# Altium PCB RC_LPF_PI.PcbDoc
Units mm, origin at the board's own origin, x right, y up, seen from the top; angles counter-clockwise.
Board outline 180 x 65 mm, 2 copper layers (Top Layer, Bottom Layer); 100 components, 41 nets, 200 pads, 61 vias.
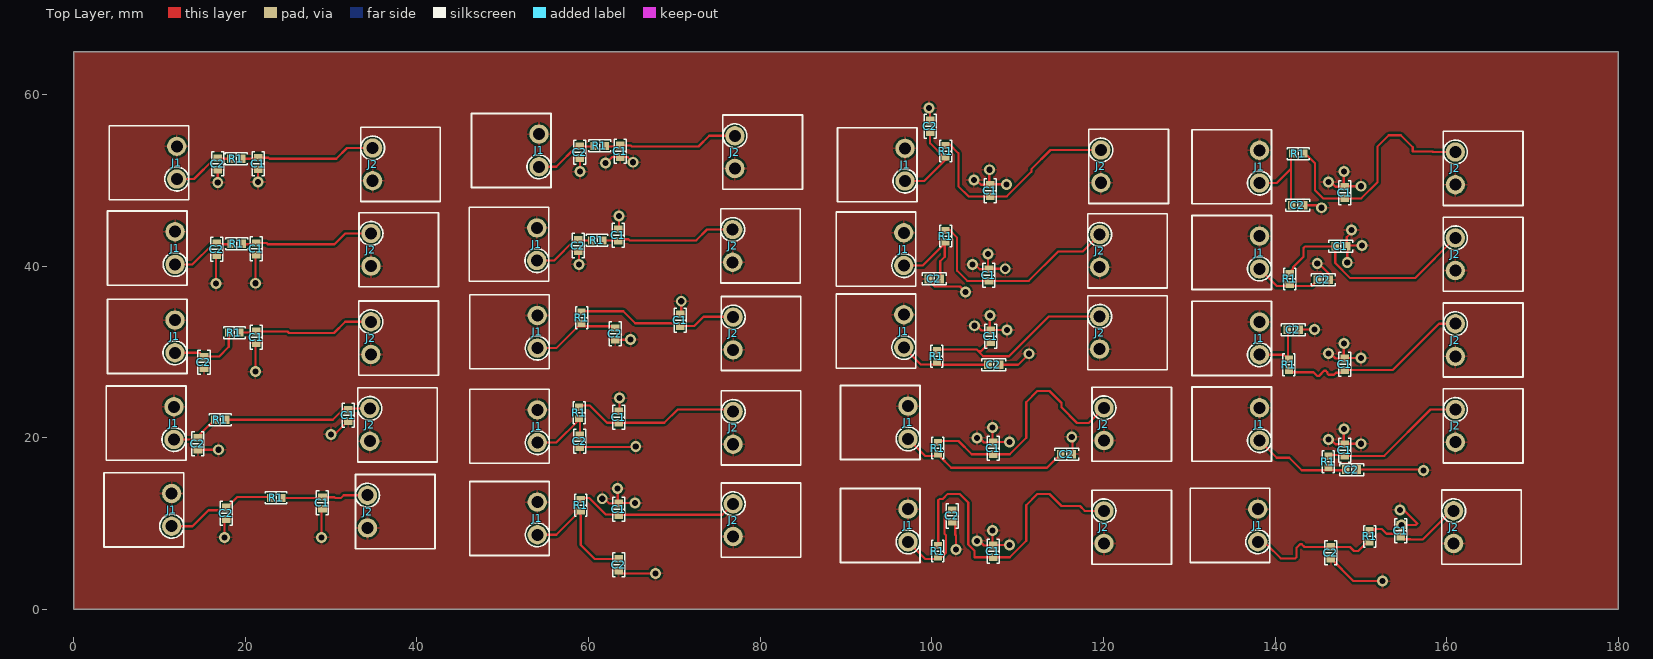
[diagram p0: Top Layer view]
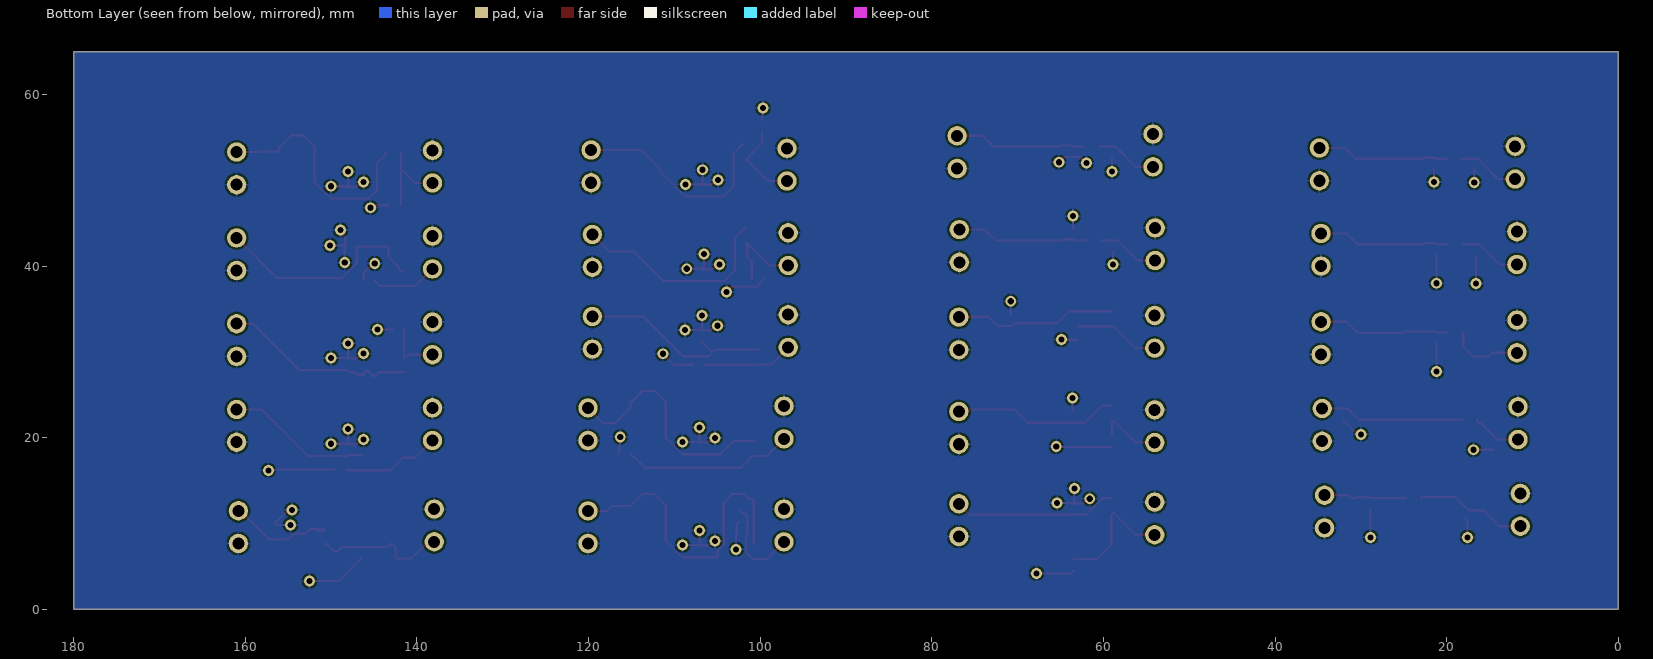
[diagram p1: Bottom Layer view, seen from below]
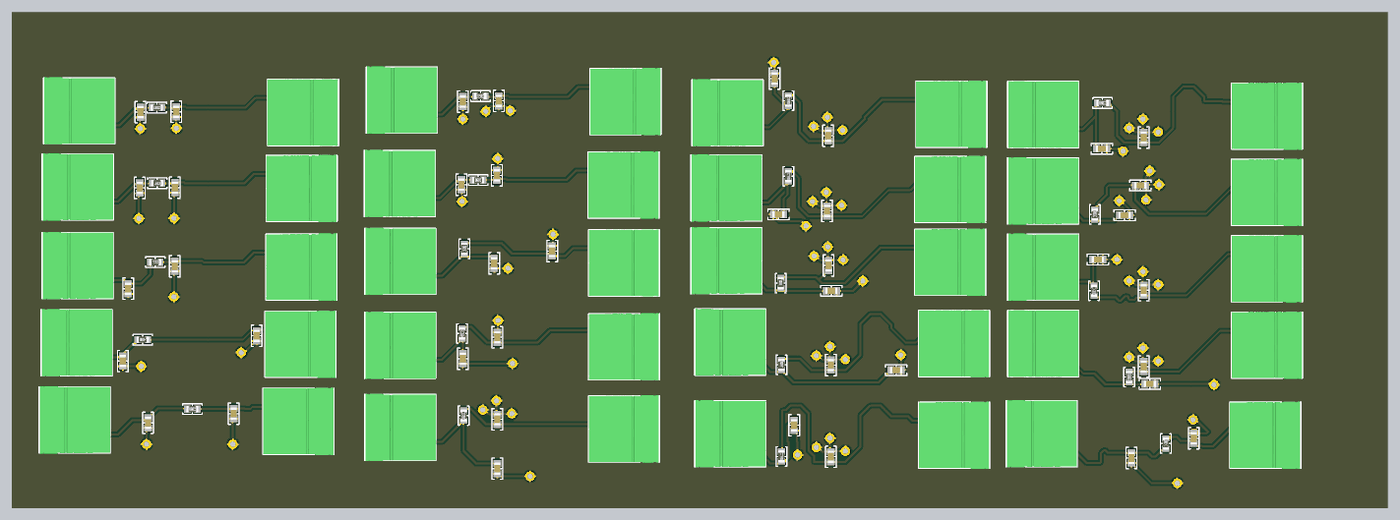
[diagram p2: 3D render of the assembled board from above, using the file's embedded part models]

## Layer stack, top to bottom
Top Solder: solder mask 0.0102, Solder Resist, Dk 3.5
Top Layer: signal copper 0.0356
Dielectric 1: dielectric 0.32, FR-4, Dk 4.8
Bottom Layer: signal copper 0.0356
Bottom Solder: solder mask 0.0102, Solder Resist, Dk 3.5

## Board outline
0,0 180,0 180,65 0,65

## Design rules (kind name [scope] priority, off if disabled: settings)
Clearance [All] p1: gap=0.254 ignorepadtopadclearanceinfootprint=FALSE except(0: Arc-Hole Track-Hole SMDPad-Hole THPad-Hole Via-Hole Fill-Hole Poly-Hole Region-Hole Text-Hole)
PolygonConnect [All] p1: connectstyle=Relief reliefconductorwidth=0.254 reliefentries=4 polygonreliefangle="90 Angle" airgapwidth=0.254
RoutingVias [All] p1: holewidth=0.711 width=1.27 viastyle="Through Hole" minholewidth=0.711 minwidth=1.27 maxholewidth=0.711 maxwidth=1.27
SolderMaskExpansion [All] p1: expansion=0.102 istentingtop=FALSE
Width [All] p1: maxlimit=0.254 minlimit=0.254 preferedwidth=0.254
30 further rules are at their usual default settings.

## Classes and differential pairs
channel class RC_LPF_PI: Filter1 Filter2 Filter3 Filter4 Filter5 Filter6 Filter7 Filter8 Filter9 Filter10 Filter11 Filter12 Filter13 Filter14 Filter15 Filter16 Filter17 Filter18 Filter19 Filter20
component class Filter20: C2_Filter20
component class Filter19: C1_Filter19
component class Filter18: C1_Filter18
component class Filter17: C1_Filter17 C2_Filter17
component class Filter16: C1_Filter16
component class Filter14: J1_Filter14
component class Filter13: C1_Filter13 J1_Filter13
component class Filter12: C1_Filter12 C2_Filter12
component class Filter11: C2_Filter11 J1_Filter11 R1_Filter11
component class Filter10: C1_Filter10 J1_Filter10 R1_Filter10
component class Filter9: C1_Filter9 J1_Filter9 R1_Filter9
component class Filter8: R1_Filter8
component class Filter7: C1_Filter7 C2_Filter7 R1_Filter7
component class Filter6: C1_Filter6 C2_Filter6 R1_Filter6
component class Filter5: C1_Filter5 C2_Filter5 R1_Filter5
component class Filter4: J1_Filter4 R1_Filter4
component class Filter3: C1_Filter3
component class Filter2: C2_Filter2
component class Filter1: C1_Filter1 C2_Filter1 J1_Filter1

## Components (designator, comment, footprint, x,y, rotation, side; value= is the part's Value field where it differs from the comment)
C1 "" "CAP 0603_1608" 21.5,51.95 r90 top value="10 µF"
C1 "" "CAP 0603_1608" 21.305,42.002 r90 top value="10 µF"
C1 "" "CAP 0603_1608" 21.293,31.706 r90 top value="10 µF"
C1 "" "CAP 0603_1608" 32,22.6 r90 top value="10 µF"
C1 "" "CAP 0603_1608" 29.005,12.402 r90 top value="10 µF"
C1 "" "CAP 0603_1608" 63.705,53.375 r90 top value="10 µF"
C1 "" "CAP 0603_1608" 63.445,43.617 r270 top value="10 µF"
C1 "" "CAP 0603_1608" 70.7,33.7 r270 top value="10 µF"
C1 "" "CAP 0603_1608" 63.5,22.417 r270 top value="10 µF"
C1 "" "CAP 0603_1608" 63.5,11.667 r270 top value="10 µF"
C1 "" "CAP 0603_1608" 106.8,48.8 r270 top value="10 µF"
C1 "" "CAP 0603_1608" 106.658,38.958 r270 top value="10 µF"
C1 "" "CAP 0603_1608" 106.858,31.816 r270 top value="10 µF"
C1 "" "CAP 0603_1608" 107.158,18.764 r270 top value="10 µF"
C1 "" "CAP 0603_1608" 107.158,6.764 r270 top value="10 µF"
C1 "" "CAP 0603_1608" 148.1,48.569 r270 top value="10 µF"
C1 "" "CAP 0603_1608" 147.669,42.3 r180 top value="10 µF"
C1 "" "CAP 0603_1608" 148.1,28.569 r270 top value="10 µF"
C1 "" "CAP 0603_1608" 148.1,18.569 r270 top value="10 µF"
C1 "" "CAP 0603_1608" 154.65,9.175 r270 top value="10 µF"
C2 "" "CAP 0603_1608" 146.5,6.6 r90 top value="10 µF"
C2 "" "CAP 0603_1608" 148.9,16.3 r180 top value="10 µF"
C2 "" "CAP 0603_1608" 142.1,32.6 r180 top value="10 µF"
C2 "" "CAP 0603_1608" 145.6,38.4 r180 top value="10 µF"
C2 "" "CAP 0603_1608" 142.625,47.1 r180 top value="10 µF"
C2 "" "CAP 0603_1608" 102.362,10.885 r90 top value="10 µF"
C2 "" "CAP 0603_1608" 115.7,18.1 r180 top value="10 µF"
C2 "" "CAP 0603_1608" 107.225,28.5 r180 top value="10 µF"
C2 "" "CAP 0603_1608" 100.3,38.5 r0 top value="10 µF"
C2 "" "CAP 0603_1608" 99.8,56.3 r270 top value="10 µF"
C2 "" "CAP 0603_1608" 63.5,5.2 r90 top value="10 µF"
C2 "" "CAP 0603_1608" 59,19.6 r90 top value="10 µF"
C2 "" "CAP 0603_1608" 63.1,32.1 r90 top value="10 µF"
C2 "" "CAP 0603_1608" 58.8,42.4 r90 top value="10 µF"
C2 "" "CAP 0603_1608" 59,53.275 r90 top value="10 µF"
C2 "" "CAP 0603_1608" 17.8,11.2 r90 top value="10 µF"
C2 "" "CAP 0603_1608" 14.5,19.3 r90 top value="10 µF"
C2 "" "CAP 0603_1608" 15.2,28.775 r90 top value="10 µF"
C2 "" "CAP 0603_1608" 16.7,41.975 r90 top value="10 µF"
C2 "" "CAP 0603_1608" 16.8,51.9 r90 top value="10 µF"
J1 "" "FCI 06-381-2PIN" 8.726,52.049 r90 top
J1 "" "FCI 06-381-2PIN" 8.531,42.101 r90 top
J1 "" "FCI 06-381-2PIN" 8.519,31.805 r90 top
J1 "" "FCI 06-381-2PIN" 8.394,21.705 r90 top
J1 "" "FCI 06-381-2PIN" 8.131,11.601 r90 top
J1 "" "FCI 06-381-2PIN" 50.931,53.474 r90 top
J1 "" "FCI 06-381-2PIN" 50.676,42.549 r90 top
J1 "" "FCI 06-381-2PIN" 50.731,32.349 r90 top
J1 "" "FCI 06-381-2PIN" 50.731,21.349 r90 top
J1 "" "FCI 06-381-2PIN" 50.731,10.599 r90 top
J1 "" "FCI 06-381-2PIN" 93.573,51.816 r90 top
J1 "" "FCI 06-381-2PIN" 93.431,41.974 r90 top
J1 "" "FCI 06-381-2PIN" 93.431,32.432 r90 top
J1 "" "FCI 06-381-2PIN" 93.931,21.78 r90 top
J1 "" "FCI 06-381-2PIN" 93.931,9.78 r90 top
J1 "" "FCI 06-381-2PIN" 134.873,51.585 r90 top
J1 "" "FCI 06-381-2PIN" 134.873,41.585 r90 top
J1 "" "FCI 06-381-2PIN" 134.873,31.585 r90 top
J1 "" "FCI 06-381-2PIN" 134.873,21.585 r90 top
J1 "" "FCI 06-381-2PIN" 134.673,9.785 r90 top
J2 "" "FCI 06-381-2PIN" 38.15,51.85 r270 top
J2 "" "FCI 06-381-2PIN" 37.955,41.902 r270 top
J2 "" "FCI 06-381-2PIN" 37.943,31.606 r270 top
J2 "" "FCI 06-381-2PIN" 37.818,21.506 r270 top
J2 "" "FCI 06-381-2PIN" 37.555,11.402 r270 top
J2 "" "FCI 06-381-2PIN" 80.355,53.275 r270 top
J2 "" "FCI 06-381-2PIN" 80.1,42.35 r270 top
J2 "" "FCI 06-381-2PIN" 80.155,32.15 r270 top
J2 "" "FCI 06-381-2PIN" 80.155,21.15 r270 top
J2 "" "FCI 06-381-2PIN" 80.155,10.4 r270 top
J2 "" "FCI 06-381-2PIN" 122.997,51.617 r270 top
J2 "" "FCI 06-381-2PIN" 122.855,41.775 r270 top
J2 "" "FCI 06-381-2PIN" 122.855,32.233 r270 top
J2 "" "FCI 06-381-2PIN" 123.355,21.581 r270 top
J2 "" "FCI 06-381-2PIN" 123.355,9.581 r270 top
J2 "" "FCI 06-381-2PIN" 164.297,51.386 r270 top
J2 "" "FCI 06-381-2PIN" 164.297,41.386 r270 top
J2 "" "FCI 06-381-2PIN" 164.297,31.386 r270 top
J2 "" "FCI 06-381-2PIN" 164.297,21.386 r270 top
J2 "" "FCI 06-381-2PIN" 164.097,9.586 r270 top
R1 "" "RES 0603_1608" 151,8.5 r90 top value="560 Ohms"
R1 "" "RES 0603_1608" 146.2,17.2 r90 top value="560 Ohms"
R1 "" "RES 0603_1608" 141.6,28.5 r270 top value="560 Ohms"
R1 "" "RES 0603_1608" 141.7,38.5 r90 top value="560 Ohms"
R1 "" "RES 0603_1608" 142.7,53.1 r0 top value="560 Ohms"
R1 "" "RES 0603_1608" 100.7,6.8 r90 top value="560 Ohms"
R1 "" "RES 0603_1608" 100.7,18.8 r90 top value="560 Ohms"
R1 "" "RES 0603_1608" 100.6,29.5 r90 top value="560 Ohms"
R1 "" "RES 0603_1608" 101.6,43.5 r90 top value="560 Ohms"
R1 "" "RES 0603_1608" 101.6,53.4 r90 top value="560 Ohms"
R1 "" "RES 0603_1608" 59.1,12.15 r90 top value="560 Ohms"
R1 "" "RES 0603_1608" 58.9,22.9 r90 top value="560 Ohms"
R1 "" "RES 0603_1608" 59.2,34 r90 top value="560 Ohms"
R1 "" "RES 0603_1608" 61,43 r0 top value="560 Ohms"
R1 "" "RES 0603_1608" 61.3,54 r0 top value="560 Ohms"
R1 "" "RES 0603_1608" 23.6,13 r0 top value="560 Ohms"
R1 "" "RES 0603_1608" 17.1,22.1 r0 top value="560 Ohms"
R1 "" "RES 0603_1608" 18.743,32.256 r0 top value="560 Ohms"
R1 "" "RES 0603_1608" 19,42.6 r0 top value="560 Ohms"
R1 "" "RES 0603_1608" 18.95,52.5 r0 top value="560 Ohms"

## Footprints (in the part's own frame and the unit in brackets; to place one, negate y for a bottom-side part, rotate by r counter-clockwise, add the part's x,y. Pads: shape width x height; smd on the part's side, far side on the other; paste and mask are expansions set on the pad)
"CAP 0603_1608" [mm] "Chip Capacitor, 2-Leads, Body 1.60x0.80mm, IPC Medium Density"
  rect 0.9x1 smd: 1(-0.675,0) 2(0.675,0)
  silkscreen extent -1.4,-0.7 1.4,0.7, body extent -0.8,-0.41 0.8,0.41, height 0.82
"FCI 06-381-2PIN" [mm] "FCI Pluggable Terminal Block"
  round 2.25 hole 1.4: 1(-1.905,-3.302) 2(1.905,-3.302)
  silkscreen extent -4.32,-4.7 4.32,4.57, body extent -4.4,-4.7 4.4,4.5, height 7.6
"RES 0603_1608" [mm] "Chip Resistor, 2-Leads, Body 1.60x0.80mm, IPC Medium Density"
  rect 0.85x0.95 smd: 1(-0.65,0) 2(0.65,0)
  silkscreen extent -1.27,-0.7 1.27,0.7, body extent -0.8,-0.4 0.8,0.4, height 0.45

## Part data
C1 C1 C1 C1 C1 C1 C1 C1 C1 C1 C1 C1 C1 C1 C1 C1 C1 C1 C1 C1 C2 C2 C2 C2 C2 C2 C2 C2 C2 C2 C2 C2 C2 C2 C2 C2 C2 C2 C2 C2: library part MD0603BW106M100NHT-EM, "CAP CER 10UF 10V X5R 0603", Capacitance="10 µF", Device Package="0603 (1608 Metric)", manufacturer="Knowles Novacap", Operating Temperature="-55°C ~ 85°C", Supplier Part Number 1=1763-MD0603BW106M100NHT-EMCT-ND, Temperature Coefficient=X5R, Tolerance=±20%, Voltage - Rated=10V, Applications="Medical, Non-Critical", componentlink1description=Datasheet, componentlink1url="https://mm.digikey.com/Volume0/opasdata/d220001/medias/docus/5546/MD Series R3.pdf", componentlink2description="DigiKey Link", componentlink2url=https://www.digikey.com/en/products/detail/knowles-novacap/MD0603BW106M100NHT-EM/21406876, lastupdated="02/11/2023 19:09:18", Lifecycle Status=Active, Minimum Order=1, Mounting Type="Surface Mount, MLCC", Package / Case="0603 (1608 Metric)", packaging=TapeAndReel, Part Number=MD0603BW106M100NHT-EM, partid=56748, price=0.24, series=MD, Supplier 1=DigiKey
J1 J1 J1 J1 J1 J1 J1 J1 J1 J1 J1 J1 J1 J1 J1 J1 J1 J1 J1 J1 J2 J2 J2 J2 J2 J2 J2 J2 J2 J2 J2 J2 J2 J2 J2 J2 J2 J2 J2 J2: library part OQ0232510000G, "TERM BLOCK HDR 2POS 90DEG 3.81MM", Color=Green, Current - UL=10A, manufacturer="Amphenol Anytek", Operating Temperature="-40°C ~ 115°C", Supplier Part Number 1=609-3819-ND, Voltage - UL=300V, componentlink1description=Datasheet, componentlink1url=http://portal.fciconnect.com/Comergent//fci/drawing/oqxx32x100j0g.pdf, componentlink2description="DigiKey Link", componentlink2url=//digikey.com/product-detail/en/amphenol-anytek/OQ0232510000G/609-3819-ND/2261255, Contact Mating Finish=Tin, Header Orientation="90°, Right Angle", lastupdated="16/12/2019 19:14:30", Lifecycle Status=0, Minimum Order=1, Mounting Type="Through Hole", Number of Levels=1, Number of Positions=2, packaging=Bulk, Part Number=OQ0232510000G, Part Status=Active, Pitch="0.150\" (3.81mm)", Positions Per Level=2, price=0.49, series=06-381, Supplier 1=DigiKey, Termination Style=Solder, Type="Header, Male Pins, Shrouded (4 Side)"
R1 R1 R1 R1 R1 R1 R1 R1 R1 R1 R1 R1 R1 R1 R1 R1 R1 R1 R1 R1: library part CRGP0603F560R, "RES 560 OHM 1% 1/4W 0603", Device Package="0603 (1608 Metric)", manufacturer="TE Connectivity Passive Product", Operating Temperature="-55°C ~ 155°C", Power (Watts)="0.25W, 1/4W", Resistance="560 Ohms", Supplier Device Package=0603, Supplier Part Number 1=A130413CT-ND, Temperature Coefficient=±100ppm/°C, Tolerance=±1%, componentlink1description=Datasheet, componentlink1url=https://www.te.com/commerce/DocumentDelivery/DDEController?Action=srchrtrv&DocNm=9-1773463-9&DocType=DS&DocLang=English, componentlink2description="DigiKey Link", componentlink2url=https://www.digikey.com/en/products/detail/te-connectivity-passive-product/CRGP0603F560R/8577015, Composition="Thick Film", Features="Pulse Withstanding", Height - Seated (Max)="0.022\" (0.55mm)", lastupdated="02/11/2023 19:45:35", Lifecycle Status=Active, Minimum Order=1, Number of Terminations=2, Package / Case="0603 (1608 Metric)", packaging=TapeAndReel, Part Number=CRGP0603F560R, Part Status=Active, partid=4997, price=0.02, series=CRGP, Size / Dimension="0.063\" L x 0.031\" W (1.60mm x 0.80mm)", Supplier 1=DigiKey

## Via types
v1: diameter 1.27, hole 0.711, Top Layer to Bottom Layer, 61 vias

## Nets (pads, with @x,y where several pads share a name; then routed paths per layer and width w, separated by ;. In a path a pad name is that pad's centre, name@x,y a point inside that pad or via, vN(x,y) a via of type N, cw(c..) or ccw(c..) an arc to the next point about the centre after c; other vN are vias at no path point)
GND: C1.1 C2.1 J1.2 J2.2 | length 149.3
  Top Layer w0.254: C2.1@14.5,18.625 14.525,18.6 v1(16.9,18.6) ; v1(16.595,37.973) C2.1@16.595,41.195 ; v1(16.8,49.75) C2.1@16.8,51.225 ; v1(17.6,8.4) 17.6,10.325 C2.1@17.8,10.525 ; v1(21.188,27.704) 21.188,30.926 C1.1@21.293,31.031 ; v1(21.2,38) 21.2,41.222 C1.1@21.305,41.327 ; v1(21.5,49.8) C1.1@21.5,51.275 ; v1(28.9,8.4) 28.9,11.622 C1.1@29.005,11.727 ; v1(30,20.4) 30.194,20.594 30.619,20.594 31.95,21.925 C1.1@32,21.925 ; C2.1@58.8,41.725 58.9,41.625 v1(58.9,40.2) ; C2.1@59,18.925 65.446,18.925 v1(65.501,18.98) ; v1(59,51) C2.1@59,52.6 ; v1(61.6,12.898) 61.875,12.898 62.431,12.342 C1.1@63.5,12.342 ; v1(62,52) 62.037,52 62.737,52.7 63.705,52.7 64.586,52.7 65.186,52.1 v1(65.2,52.1) ; C2.1@63.1,31.425 64.896,31.425 v1(64.911,31.44) ; v1(63.4,14.098) 63.4,12.442 C1.1@63.5,12.342 ; C1.1@63.445,44.292 63.545,44.392 v1(63.545,45.817) ; C2.1@63.5,4.525 63.823,4.202 67.798,4.202 v1(67.8,4.2) ; C1.1@63.5,23.092 63.6,23.192 v1(63.6,24.617) ; v1(65.4,12.398) 63.556,12.398 C1.1@63.5,12.342 ; C1.1@70.7,34.375 70.8,34.475 v1(70.8,35.9) ; C2.1@99.625,38.5 99.625,38.475 100.144,37.956 100.144,37.842 100.367,37.619 103.281,37.619 v1(103.9,37) ; v1(99.68,58.399) 99.8,58.279 C2.1@99.8,56.975 ; C2.1@102.362,10.21 102.372,10.2 102.5,10.2 102.735,9.965 102.735,8.711 102.8,8.646 v1(102.8,7) ; v1(104.758,40.189) 105.033,40.189 105.589,39.633 C1.1@106.658,39.633 ; v1(104.9,50.031) 105.175,50.031 105.731,49.475 C1.1@106.8,49.475 ; v1(104.958,33.047) 105.233,33.047 105.789,32.491 C1.1@106.858,32.491 ; v1(105.258,7.995) 105.533,7.995 106.089,7.439 C1.1@107.158,7.439 ; v1(105.258,19.995) 105.533,19.995 106.089,19.439 C1.1@107.158,19.439 ; C1.1@106.558,39.633 C1.1@106.658,39.633 ; v1(106.558,41.389) 106.558,39.733 C1.1@106.658,39.633 ; C1.1@106.7,49.475 C1.1@106.8,49.475 ; v1(106.7,51.231) 106.7,49.575 C1.1@106.8,49.475 ; C1.1@106.758,32.491 C1.1@106.858,32.491 ; v1(106.758,34.247) 106.758,32.591 C1.1@106.858,32.491 ; C1.1@107.058,7.439 C1.1@107.158,7.439 ; v1(107.058,9.195) 107.058,7.539 C1.1@107.158,7.439 ; C1.1@107.058,19.439 C1.1@107.158,19.439 ; v1(107.058,21.195) 107.058,19.539 C1.1@107.158,19.439 ; C2.1@107.9,28.5 110.057,28.5 v1(111.343,29.785) ; v1(108.558,39.689) 106.714,39.689 C1.1@106.658,39.633 ; v1(108.7,49.531) 106.856,49.531 C1.1@106.8,49.475 ; v1(108.758,32.547) 106.914,32.547 C1.1@106.858,32.491 ; v1(109.058,7.495) 107.214,7.495 C1.1@107.158,7.439 ; v1(109.058,19.495) 107.214,19.495 C1.1@107.158,19.439 ; v1(116.3,20.1) 116.293,20.093 116.293,19.963 116.375,19.881 C2.1@116.375,18.1 ; C2.1@142.775,32.6 v1(144.6,32.6) ; C2.1@143.3,47.1 145.1,47.1 v1(145.4,46.8) ; v1(144.9,40.3) 145.093,40.3 146.193,39.2 146.193,38.482 C2.1@146.275,38.4 ; v1(146.2,19.8) 146.475,19.8 147.031,19.244 C1.1@148.1,19.244 ; v1(146.2,29.8) 146.475,29.8 147.031,29.244 C1.1@148.1,29.244 ; v1(146.2,49.8) 146.475,49.8 147.031,49.244 C1.1@148.1,49.244 ; C2.1@146.5,5.925 149.125,3.3 v1(152.5,3.3) ; C1.1@148,19.244 C1.1@148.1,19.244 ; v1(148,21) 148,19.344 C1.1@148.1,19.244 ; C1.1@148,29.244 C1.1@148.1,29.244 ; v1(148,31) 148,29.344 C1.1@148.1,29.244 ; C1.1@148,49.244 C1.1@148.1,49.244 ; v1(148,51) 148,49.344 C1.1@148.1,49.244 ; C1.1@148.344,42.4 C1.1@148.344,42.3 ; v1(148.4,40.4) 148.4,42.244 C1.1@148.344,42.3 ; v1(148.9,44.2) 148.9,43.925 148.344,43.369 C1.1@148.344,42.3 ; C2.1@149.575,16.3 157.2,16.3 v1(157.3,16.2) ; v1(150,19.3) 148.156,19.3 C1.1@148.1,19.244 ; v1(150,29.3) 148.156,29.3 C1.1@148.1,29.244 ; v1(150,49.3) 148.156,49.3 C1.1@148.1,49.244 ; v1(150.1,42.4) 148.444,42.4 C1.1@148.344,42.3 ; v1(154.55,11.606) 154.744,11.412 155.15,11.412 156.549,10.013 156.375,9.839 v1(154.731,9.839)
IN_Filter1: C2.2@16.8,52.575 J1.1@12.028,50.144 R1.1@18.3,52.5 | length 7.2
  Top Layer w0.254: J1.1@12.028,50.144 14.044,50.144 16.4,52.5 R1.1@18.3,52.5
IN_Filter2: C2.2@16.7,42.65 J1.1@11.833,40.196 R1.1@18.35,42.6 | length 7.2
  Top Layer w0.254: J1.1@11.833,40.196 13.849,40.196 16.205,42.552 R1.1@18.105,42.552
IN_Filter3: C2.2@15.2,29.45 J1.1@11.821,29.9 R1.1@18.093,32.256 | length 8.6
  Top Layer w0.254: J1.1@11.821,29.9 14.7,29.9 15.15,29.45 15.2,29.45 16.95,29.45 18.093,30.593 R1.1@18.093,32.256
IN_Filter4: C2.2@14.5,19.975 J1.1@11.696,19.8 R1.1@16.45,22.1 | length 5.8
  Top Layer w0.254: J1.1@11.696,19.8 14.125,19.8 15.987,21.662 16.172,21.662 16.425,21.915 R1.1@16.425,22.1
IN_Filter5: C2.2@17.8,11.875 J1.1@11.433,9.696 R1.1@22.95,13 | length 13.2
  Top Layer w0.254: J1.1@11.433,9.696 13.862,9.696 15.724,11.558 17.483,11.558 17.8,11.875 17.85,11.875 19.075,13.1 22.925,13.1 23.025,13 R1.1@23.025,12.815
IN_Filter6: C2.2@59,53.95 J1.1@54.233,51.569 R1.1@60.65,54 | length 7.2
  Top Layer w0.254: J1.1@54.233,51.569 56.249,51.569 58.605,53.925 R1.1@60.505,53.925
IN_Filter7: C2.2@58.8,43.075 J1.1@53.978,40.644 R1.1@60.35,43 | length 7.2
  Top Layer w0.254: J1.1@53.978,40.644 55.994,40.644 58.35,43 R1.1@60.25,43
IN_Filter8: C2.2@63.1,32.775 J1.1@54.033,30.444 R1.1@59.2,33.35 | length 10.2
  Top Layer w0.254: J1.1@54.033,30.444 56.259,30.444 58.815,33 59,33 62.875,33 C2.2@63.1,32.775
IN_Filter9: C2.2@59,20.275 J1.1@54.033,19.444 R1.1@58.9,22.25 | length 7.6
  Top Layer w0.254: J1.1@54.033,19.444 56.259,19.444 58.815,22 59,21.815 C2.2@59,20.275
IN_Filter10: C2.2@63.5,5.875 J1.1@54.033,8.694 R1.1@59.1,11.5 | length 14.8
  Top Layer w0.254: J1.1@54.033,8.694 56.259,8.694 58.815,11.25 58.847,11.25 59.1,10.997 59.1,7.5 60.725,5.875 C2.2@63.5,5.875
IN_Filter11: C2.2@99.8,55.625 J1.1@96.875,49.911 R1.1@101.6,52.75 | length 10
  Top Layer w0.254: J1.1@96.875,49.911 99.101,49.911 R1.1@101.657,52.467 ; C2.2@99.8,55.625 99.8,54.324 R1.1@101.462,52.662 ; R1.1@101.362,52.562 101.557,52.367 R1.1@101.742,52.367
IN_Filter12: C2.2@100.975,38.5 J1.1@96.733,40.069 R1.1@101.6,42.85 | length 10.5
  Top Layer w0.254: J1.1@96.733,40.069 98.959,40.069 101.515,42.625 101.7,42.625 101.5,42.425 101.5,41.1 100.975,40.575 C2.2@100.975,38.5
IN_Filter13: C2.2@106.55,28.5 J1.1@96.733,30.527 R1.1@100.6,28.85 | length 10.7
  Top Layer w0.254: J1.1@96.733,30.527 98.735,28.525 100.2,28.525 100.225,28.5 C2.2@106.55,28.5
IN_Filter14: C2.2@115.025,18.1 J1.1@97.233,19.875 R1.1@100.7,18.15 | length 19.9
  Top Layer w0.254: J1.1@97.233,19.875 99.235,17.873 100.7,17.873 100.885,17.873 102.258,16.5 113.425,16.5 114.652,17.727 114.702,17.727 115.025,18.05 C2.2@115.025,18.1
IN_Filter15: C2.2@102.362,11.56 J1.1@97.233,7.875 R1.1@100.7,6.15 | length 11
  Top Layer w0.254: J1.1@97.233,7.875 99.235,5.873 100.7,5.873 100.885,5.873 101.646,6.634 101.646,8.643 101.481,8.808 101.481,10.818 101.9,11.237 102.039,11.237 C2.2@102.362,11.56
IN_Filter16: C2.2@141.95,47.1 J1.1@138.175,49.68 R1.1@142.05,53.1 | length 10.5
  Top Layer w0.254: J1.1@138.175,49.68 140.18,49.68 141.85,51.35 ; R1.1@141.85,53.2 141.85,51.35 ; C2.2@141.95,47.1 141.85,47.2 141.85,51.35
IN_Filter17: C2.2@144.925,38.4 J1.1@138.175,39.68 R1.1@141.7,37.85 | length 7.9
  Top Layer w0.254: J1.1@138.175,39.68 140.177,37.678 141.642,37.678 144.253,37.678 144.925,38.35 C2.2@144.925,38.4
IN_Filter18: C2.2@141.425,32.6 J1.1@138.175,29.68 R1.1@141.6,29.15 | length 6.7
  Top Layer w0.254: J1.1@138.175,29.68 141.01,29.68 141.315,29.375 141.5,29.375 141.5,32.525 C2.2@141.425,32.6
IN_Filter19: C2.2@148.225,16.3 J1.1@138.175,19.68 R1.1@146.2,16.55 | length 11.5
  Top Layer w0.254: J1.1@138.175,19.68 140.177,17.678 141.642,17.678 143.095,16.225 146.4,16.225 148.15,16.225 C2.2@148.225,16.3
IN_Filter20: C2.2@146.5,7.275 J1.1@137.975,7.88 R1.1@151,7.85 | length 15.5
  Top Layer w0.254: J1.1@137.975,7.88 138.357,7.498 139.093,7.498 140.645,5.947 142.347,5.947 142.5,6.1 142.5,7.2 142.895,7.595 143.105,7.595 143.425,7.275 146.5,7.275 148.725,7.275 149.195,6.805 149.695,6.805 150.515,7.625 R1.1@150.7,7.625
OUT_Filter1: C1.2@21.5,52.625 J2.1@34.848,53.755 R1.2@19.6,52.5 | length 15.4
  Top Layer w0.254: 20.05,52.5 21.375,52.5 21.5,52.625 22.7,52.625 22.825,52.5 30.6,52.5 31.855,53.755 J2.1@34.848,53.755
OUT_Filter2: C1.2@21.305,42.677 J2.1@34.653,43.807 R1.2@19.65,42.6 | length 15.4
  Top Layer w0.254: R1.2@19.855,42.552 21.18,42.552 21.305,42.677 22.505,42.677 22.63,42.552 30.405,42.552 31.66,43.807 J2.1@34.653,43.807
OUT_Filter3: C1.2@21.293,32.381 J2.1@34.641,33.511 R1.2@19.393,32.256 | length 15.5
  Top Layer w0.254: 19.843,32.256 21.168,32.256 21.293,32.381 24.919,32.381 25.1,32.2 30.337,32.2 31.648,33.511 J2.1@34.641,33.511
OUT_Filter4: C1.2@32,23.275 J2.1@34.516,23.411 R1.2@17.75,22.1 | length 16.9
  Top Layer w0.254: 18.175,22.1 30.212,22.1 31.523,23.411 J2.1@34.516,23.411
OUT_Filter5: C1.2@29.005,13.077 J2.1@34.253,13.307 R1.2@24.25,13 | length 9.7
  Top Layer w0.254: 24.775,13 28.928,13 29.005,13.077 30.423,13.077 30.5,13 31.175,13 31.482,13.307 J2.1@34.253,13.307
OUT_Filter6: C1.2@63.705,54.05 J2.1@77.053,55.18 R1.2@61.95,54 | length 15.4
  Top Layer w0.254: R1.2@62.255,53.925 63.58,53.925 63.705,54.05 64.905,54.05 65.03,53.925 72.805,53.925 74.06,55.18 J2.1@77.053,55.18
OUT_Filter7: C1.2@63.445,42.942 J2.1@76.798,44.255 R1.2@61.65,43 | length 15.4
  Top Layer w0.254: R1.2@62,43 63.325,43 63.45,43.125 64.65,43.125 64.775,43 72.55,43 73.805,44.255 J2.1@76.798,44.255
OUT_Filter8: C1.2@70.7,33.025 J2.1@76.853,34.055 R1.2@59.2,34.65 | length 19
  Top Layer w0.254: R1.2@59,34.75 64.05,34.75 65.452,33.348 70.377,33.348 70.7,33.025 72.325,33.025 73.4,34.1 76.808,34.1 J2.1@76.853,34.055
OUT_Filter9: C1.2@63.5,21.742 J2.1@76.853,23.055 R1.2@58.9,23.55 | length 19.4
  Top Layer w0.254: R1.2@59,23.75 60.15,23.75 62.158,21.742 63.5,21.742 68.842,21.742 70.4,23.3 76.608,23.3 J2.1@76.853,23.055
OUT_Filter10: C1.2@63.5,10.992 J2.1@76.853,12.305 R1.2@59.1,12.8 | length 19.1
  Top Layer w0.254: R1.2@59,13 60.05,13 62,11.05 C1.2@63.38,11.05 ; C1.2@63.5,10.992 63.533,11.025 75.573,11.025 J2.1@76.853,12.305
OUT_Filter11: C1.2@106.8,48.125 J2.1@119.695,53.522 R1.2@101.6,54.05 | length 25
  Top Layer w0.254: R1.2@101.842,54.217 102.027,54.217 103.09,53.154 103.09,49.31 104.275,48.125 106.8,48.125 108.731,48.125 111.6,50.994 111.6,51.3 113.822,53.522 J2.1@119.695,53.522
OUT_Filter12: C1.2@106.658,38.283 J2.1@119.553,43.68 R1.2@101.6,44.15 | length 24.9
  Top Layer w0.254: R1.2@101.7,44.375 101.885,44.375 102.948,43.312 102.948,39.468 104.133,38.283 106.658,38.283 111.3,38.283 114.717,41.7 117.573,41.7 J2.1@119.553,43.68
OUT_Filter13: C1.2@106.858,31.141 J2.1@119.553,34.138 R1.2@100.6,30.15 | length 23.5
  Top Layer w0.254: R1.2@100.2,30.275 105.225,30.275 105.4,30.1 ; C1.2@106.858,31.141 106.808,31.141 105.767,30.1 105.4,30.1 ; J2.1@119.553,34.138 119.55,34.136 113.636,34.136 109,29.5 106,29.5 105.4,30.1
OUT_Filter14: C1.2@107.158,18.089 J2.1@120.053,23.486 R1.2@100.7,19.45 | length 28
  Top Layer w0.254: R1.2@100.7,19.623 103.099,19.623 104.633,18.089 107.158,18.089 109.089,18.089 111,20 111,24.148 112.3,25.448 113.7,25.448 115.1,24.048 115.1,23.546 116.915,21.731 118.298,21.731 J2.1@120.053,23.486
OUT_Filter15: C1.2@107.158,6.089 J2.1@120.053,11.486 R1.2@100.7,7.45 | length 37.4
  Top Layer w0.254: R1.2@100.7,7.623 100.758,7.681 100.758,12.715 100.907,12.864 101.258,12.864 101.858,13.464 103.226,13.464 104.242,12.448 104.242,7.574 104.958,6.858 104.958,6.089 107.158,6.089 109.089,6.089 111,8 111,12.148 112.3,13.448 113.7,13.448 115.1,12.048 117.256,12.048 117.818,11.486 J2.1@120.053,11.486
OUT_Filter16: C1.2@148.1,47.894 J2.1@160.995,53.291 R1.2@143.35,53.1 | length 28.1
  Top Layer w0.254: R1.2@143.6,53.2 143.6,53.015 144.644,51.971 144.644,48.825 145.575,47.894 148.1,47.894 150.031,47.894 151.942,49.805 151.942,53.953 153.242,55.253 154.642,55.253 156.042,53.853 156.042,53.351 158.338,53.351 158.4,53.289 160.992,53.289 J2.1@160.995,53.291
OUT_Filter17: C1.2@146.994,42.3 J2.1@160.995,43.291 R1.2@141.7,39.15 | length 25.9
  Top Layer w0.254: R1.2@141.642,39.428 141.827,39.428 142.08,39.681 142.08,39.866 143.3,41.086 143.3,42.1 143.5,42.3 146.994,42.3 146.994,40.369 148.763,38.6 156.304,38.6 J2.1@160.995,43.291
OUT_Filter18: C1.2@148.1,27.894 J2.1@160.995,33.291 R1.2@141.6,27.85 | length 22.7
  Top Layer w0.254: R1.2@141.5,27.625 144.475,27.625 144.895,27.205 145.105,27.205 145.7,27.8 145.91,27.8 146.1,27.61 146.1,27.449 146.214,27.334 146.852,27.334 147.089,27.571 147.777,27.571 148.1,27.894 153.694,27.894 159.091,33.291 J2.1@160.995,33.291
OUT_Filter19: C1.2@148.1,17.894 J2.1@160.995,23.291 R1.2@146.2,17.85 | length 16.9
  Top Layer w0.254: R1.2@146.4,17.975 148.019,17.975 148.1,17.894 152.706,17.894 158.103,23.291 J2.1@160.995,23.291
OUT_Filter20: C1.2@154.65,8.5 J2.1@160.795,11.491 R1.2@151,9.15 | length 13
  Top Layer w0.254: 151.646,9.159 150.916,9.159 150.7,9.375 152.432,9.375 152.983,8.823 154.327,8.823 154.65,8.5 154.973,8.177 155.736,8.177 155.753,8.161 157.224,8.161 160.554,11.491 J2.1@160.795,11.491

## Polygon pours and split planes (outlines as drawn)
GND on Bottom Layer "BOT_GND" (solid, pour order 1): 0,0 180,0 180,65 0,65
GND on Top Layer "TOP_GND" (solid, pour order 0): 0,0 180,0 180,65 0,65

## Silkscreen, mask and mechanical layers (free items; w line width, h text height)
Top Overlay:
Mechanical 1:
  lines w0.254: -64,-100 -64,-50 -14,-50 -14,-100 -64,-100 ; 0,0 0,65 180,65 180,0 0,0